# Altium PCB ControlBrick2_1.PcbDoc
Units mm, origin at the board's own origin, x right, y up, seen from the top; angles counter-clockwise.
Board outline 117 x 62.75 mm, 2 copper layers (Top Layer, Bottom Layer); 25 components, 129 nets, 106 pads, 0 vias.
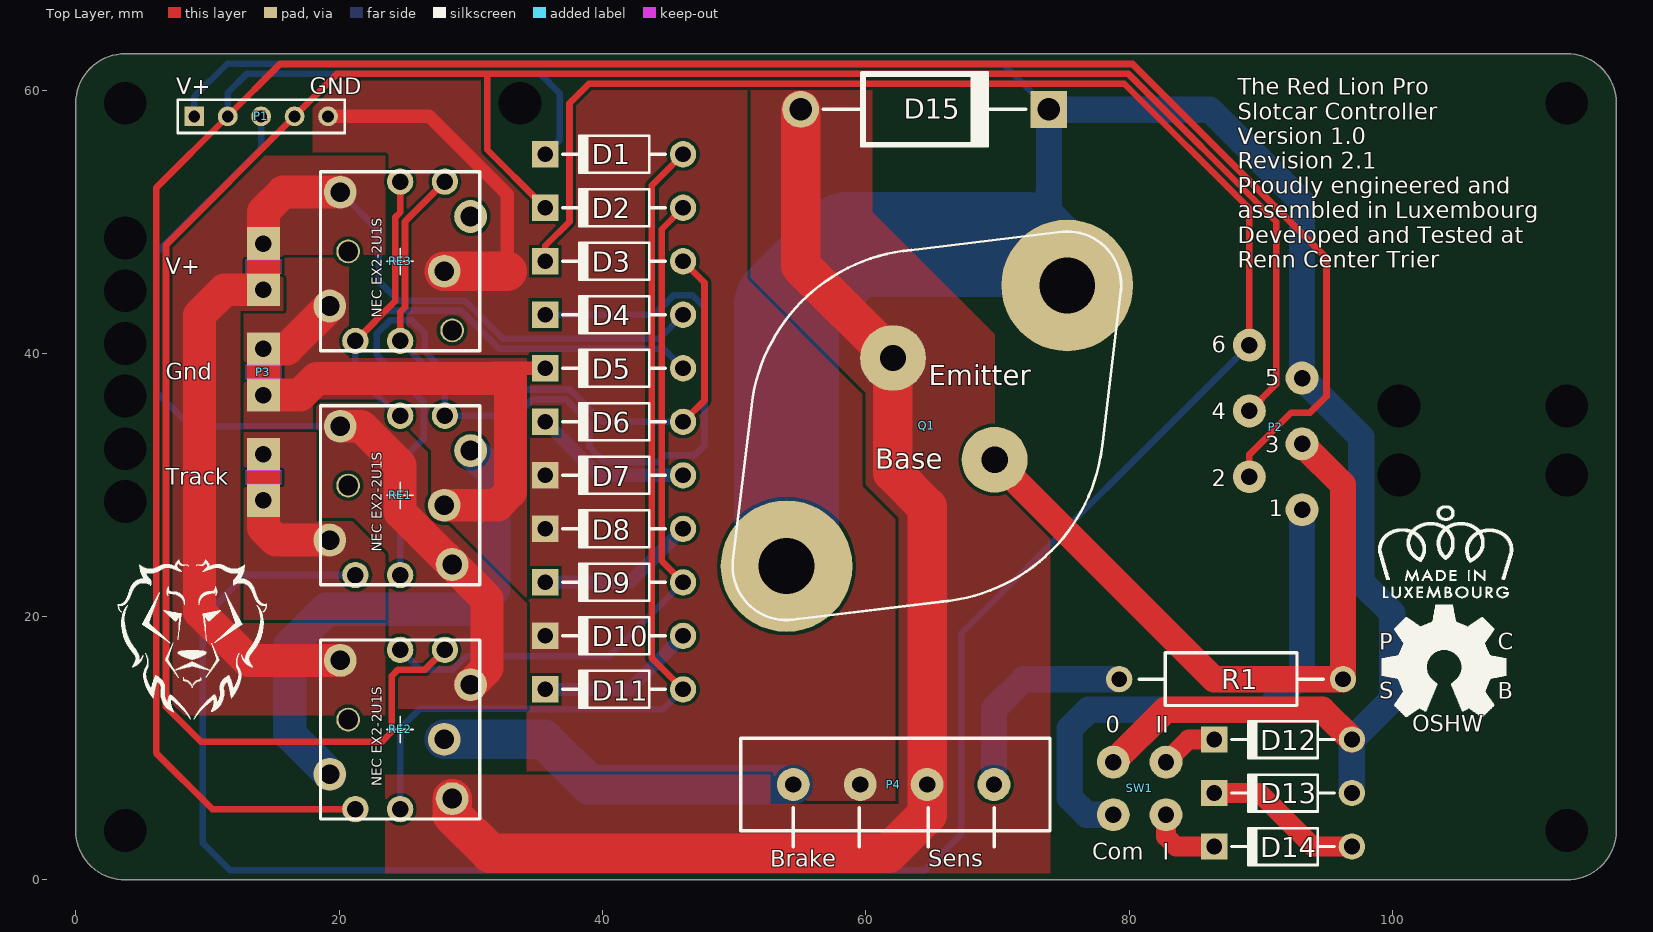
[diagram p0: Top Layer view]
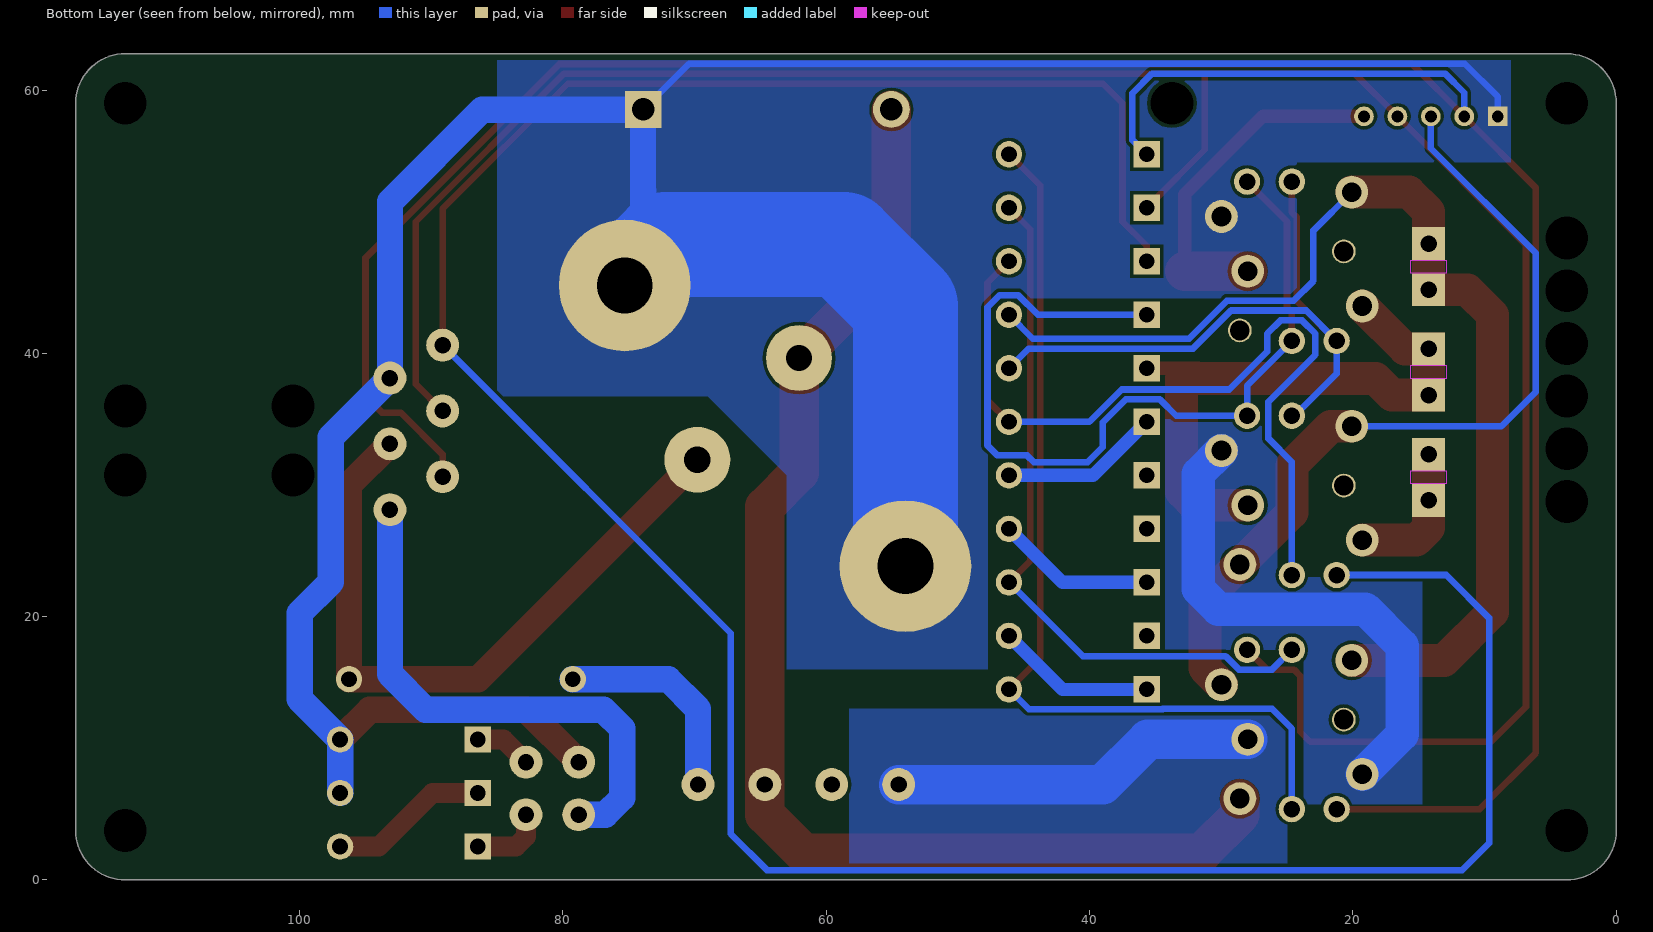
[diagram p1: Bottom Layer view, seen from below]

## Layer stack, top to bottom
Top Solder: solder mask 0.0102, Solder Resist, Dk 3.5
Top Layer: signal copper 0.0356
Dielectric 1: dielectric 0.32, FR-4, Dk 4.8
Bottom Layer: signal copper 0.0356
Bottom Solder: solder mask 0.0102, Solder Resist, Dk 3.5

## Board outline
0,3.75 ccw(c3.75,3.75) 3.75,0 113.25,0 ccw(c113.25,3.75) 117,3.75 117,59 ccw(c113.25,59) 113.25,62.75 3.75,62.75 ccw(c3.75,59) 0,59

## Design rules (kind name [scope] priority, off if disabled: settings)
Clearance [All] p1: gap=0.254 except(0.25: Track-Track Track-SMDPad Track-THPad Track-Via Track-Fill Track-Poly SMDPad-SMDPad SMDPad-THPad SMDPad-Via SMDPad-Fill SMDPad-Poly THPad-THPad THPad-Via THPad-Fill THPad-Poly Via-Via Via-Fill Via-Poly Fill-Fill Fill-Poly Poly-Poly)
ComponentClearance [All] p1 off: gap=0.254 collisioncheckmode=3 verticalgap=0.254 showdistances=FALSE
Height [All] p1 off: minheight=0 maxheight=25.4 prefheight=12.7
PlaneConnect [All] p1: planeconnectstyle=Direct reliefexpansion=0.508 reliefentries=4 reliefconductorwidth=0.254 reliefairgap=0.254
PolygonConnect [All] p1: connectstyle=Direct reliefconductorwidth=0.254 reliefentries=4 polygonreliefangle="90 Angle" airgapwidth=0.254
RoutingVias [All] p1: holewidth=0.711 width=1.27 viastyle="Through Hole" minholewidth=0.711 minwidth=1.27 maxholewidth=0.711 maxwidth=1.27
SolderMaskExpansion [All] p1: expansion=0.102
Width [All] p1: maxlimit=300 minlimit=0.01 preferedwidth=1
27 further rules are at their usual default settings.

## Components (designator, comment, footprint, x,y, rotation, side; value= is the part's Value field where it differs from the comment)
D1 "1N4002" StdDiode 40.894,55.118 r180 top
D2 "1N4002" StdDiode 40.894,51.054 r180 top
D3 "1N4002" StdDiode 40.894,46.99 r180 top
D4 "1N4002" StdDiode 40.894,42.926 r180 top
D5 "1N4002" StdDiode 40.894,38.862 r180 top
D6 "1N4002" StdDiode 40.894,34.798 r180 top
D7 "1N4002" StdDiode 40.894,30.734 r180 top
D8 "1N4002" StdDiode 40.894,26.67 r180 top
D9 "1N4002" StdDiode 40.894,22.606 r180 top
D10 "1N4002" StdDiode 40.894,18.542 r180 top
D11 "1N4002" StdDiode 40.894,14.478 r180 top
D12 "1N4002" StdDiode 91.694,10.668 r180 top
D13 "1N4002" StdDiode 91.694,6.604 r180 top
D14 "1N4002" StdDiode 91.694,2.54 r180 top
D15 "1N5402" BigDiode 64.475,58.525 r0 top
P1 "Logic" HDR1X5 9,58 r0 top
P2 "To Handle" Interconnect 93.14,28.122 r180 top
P3 "Inwards" Inwards 14.25,36.83 r90 top
P4 "Molex" Molex_4x50.8 54.5,7.25 r0 top
Q1 "BD317" TO-3 63.086,34.782 r180 top
R1 "10R2W" 2Wres 79.25,15.25 r0 top
RE1 "NEC-EX2" NEC-EX2#1 24.638,29.21 r90 top
RE2 "NEC-EX2" NEC-EX2#1 24.638,11.43 r90 top
RE3 "NEC-EX2" NEC-EX2#2 24.638,46.99 r90 top
SW1 "Reduction" "Switch SP3T" 82.804,4.953 r90 top

## Footprints (in the part's own frame and the unit in brackets; to place one, negate y for a bottom-side part, rotate by r counter-clockwise, add the part's x,y. Pads: shape width x height; smd on the part's side, far side on the other; paste and mask are expansions set on the pad)
2Wres [mm] "2 Watt Resistor"
  round 2 hole 1.2: 1(0,0) 2(17,0)
  silkscreen extent 1.5,-2 15.5,2
BigDiode [mm] "Diode, Axial; Body 9.5 x 5.6 mm (LxDia. max), Lead Dia. 1.32 mm (max)"
  round 2.8 hole 1.7: 1(-9.42,0)
  rect 2.8x2.8 hole 1.7: 2(9.42,0)
  silkscreen extent -7.7,-2.8 7.7,2.8
HDR1X5 [mm] "Connector; Header; 4 Position"
  rect 1.5x1.5 hole 0.9: 1(0,0)
  round 1.5 hole 0.9: 2(2.54,0) 3(5.08,0) 4(7.62,0) 5(10.16,0)
  silkscreen extent -1.27,-1.27 11.43,1.27
Interconnect [mm]
  round 2.5 / inner round 1.524 / far side round 2.5 hole 1.25: 1(0,0) 2(4,-2.5) 3(0,-5) 4(4,-7.5) 5(0,-10) 6(4,-12.5)
Inwards [mm] "3 Pin double connector"
  rect 2.5x2.5 / inner round 1.524 / far side rect 2.5x2.5 hole 1.25: 1(-8,0) 1(-4.5,0) 2(0,0) 2(3.5,0) 3(8,0) 3(11.5,0)
  Top Layer region: 6.75,-1.25 12.75,-1.25 12.75,1.25 6.75,1.25
  Top Layer region: -1.25,-1.25 4.75,-1.25 4.75,1.25 -1.25,1.25
  Top Layer region: -9.25,-1.25 -3.25,-1.25 -3.25,1.25 -9.25,1.25
  Multi-Layer keep-out region: 9.25,-1.35 10.25,-1.35 10.25,1.35 9.25,1.35
  Multi-Layer keep-out region: 1.25,-1.35 2.25,-1.35 2.25,1.35 1.25,1.35
  Multi-Layer keep-out region: -6.75,-1.35 -5.75,-1.35 -5.75,1.35 -6.75,1.35
Molex_4x50.8 [mm] "Molex connector 4 pin 5.08mm pitch"
  round 2.5 hole 1.25: 1(0,0) 2(5.08,0) 3(10.16,0) 4(15.24,0)
  silkscreen extent -4,-3.5 19.5,3.5
NEC-EX2#1 [mm] "NEC EX2-2U1S dual relay"
  round 2.5 hole 1.5: 1(-3.4,5.35) 4(-5.25,-3.95) 5(-0.75,-3.35) 6(3.4,-5.35) 9(5.25,4.55)
  round 2 hole 1.25: 2(-6.05,3.4) 3(-6.05,0) 7(6.05,-3.4) 8(6.05,0)
  round 1.8 hole 1.5: 10(0.75,3.95)
  silkscreen extent -6.8,-6.05 6.8,6.05
NEC-EX2#2 [mm] "NEC EX2-2U1S dual relay"
  round 2.5 hole 1.5: 1(-3.4,5.35) 5(-0.75,-3.35) 6(3.4,-5.35) 9(5.25,4.55)
  round 2 hole 1.25: 2(-6.05,3.4) 3(-6.05,0) 7(6.05,-3.4) 8(6.05,0)
  round 1.8 hole 1.5: 4(-5.25,-3.95) 10(0.75,3.95)
  silkscreen extent -6.8,-6.05 6.8,6.05
StdDiode [mm] "Diode, Axial; Body 5.2 x 2.7 mm (LxDia. max), Lead Dia. 0.86 mm (max)"
  round 2 hole 1.2: 1(-5.23,0)
  rect 2x2 hole 1.2: 2(5.23,0)
  silkscreen extent -3.9,-1.4 3.9,1.4
"Switch SP3T" [mm] "Suitable Switch"
  round 2.5 hole 1.25: 1(0,0) 2(4,4) 3(4,0) 4(0,4)
TO-3 [mm] "Oval Flange Mount with (2) Offset Leads; Pin Spacing 10.92 mm; Lead Dia. 1.15 mm (max)"
  round 5 hole 2: 1(-6.702,2.863) 2(1.019,-4.859)
  round 10 hole 4.25: 3(-12.218,-10.374) 3(9.102,10.945)
  silkscreen extent -16.32,-14.47 13.2,15.04

## Part data
D1 D2 D3 D4 D5 D6 D7 D8 D9 D10 D11 D12 D13 D14: library part "Diode 1N4002", "1 Amp General Purpose Rectifier"
D15: library part "Diode 1N5402", "3 Amp General Purpose Rectifier"
P1: library part "Header 5", "Header, 5-Pin"
P2: library part "Header 6", "Header, 6-Pin"
P3: library part "Header 3", "Header, 3-Pin"
P4: library part "Header 4", "Header, 4-Pin"
Q1: library part 2N3904, "NPN General Purpose Amplifier"
R1: library part Res2, "Resistor"
RE1 RE2: library part Component_2
RE3: library part NEC-EX2-2U1S
SW1: library part 3Way

## Free pads (board coordinates)
  round 2.5 hole 3.25: 2(3.75,3.75) 5(113.25,3.75) 6(113.25,59) 13(3.75,28.75) 14(3.75,32.75) 15(3.75,36.75) 16(3.75,40.75) 17(3.75,44.75) 18(3.75,48.75)
  round 0 hole 3.25: 3(3.75,59) 4(33.75,59) 19(100.5,36) 20(100.5,30.75) 21(113.25,36) 22(113.25,30.75)

## Nets (pads, with @x,y where several pads share a name; then routed paths per layer and width w, separated by ;. In a path a pad name is that pad's centre, name@x,y a point inside that pad or via, vN(x,y) a via of type N, cw(c..) or ccw(c..) an arc to the next point about the centre after c; other vN are vias at no path point)
+5V: 
GND: D7.2 D8.2 D10.2 P1.5 P4.2 RE3.5 | length 26.7
  Top Layer w1: P1.5 26.836,58 32.766,52.07 32.766,46.24
  Top Layer w3: RE3.5 32.766,46.24
NetD1_1: D1.1 D11.1 RE2.3 | length 71.5
  Top Layer w0.5: D11.1 43.75,16.852 43.75,52.744 D1.1
  Bottom Layer w0.5: RE2.3 24.638,11.5 26.138,13 34.435,13 34.457,12.978 44.624,12.978 D11.1
NetD1_2: D1.2 P1.2 P2.2 RE2.2 | length 211.9
  Top Layer w0.5: RE2.2 10.37,5.38 6.096,9.654 6.096,52.556 P1.2 15.516,61.976 80.264,61.976 94.996,47.244 94.996,36.746 93.75,35.5 92.317,35.5 89.14,32.324 P2.2
  Bottom Layer w0.5: P1.2 11.54,59.79 13,61.25 35.25,61.25 36.75,59.75 36.75,56.204 D1.2
NetD2_1: D2.1 D9.1 RE2.8 | length 54.6
  Top Layer w0.5: D9.1 44.5,24.23 44.5,49.43 D2.1
  Bottom Layer w0.5: RE2.8 26.138,15.98 28.659,15.98 29.679,17 40.518,17 D9.1
NetD2_2: D2.2 P1.4 P2.4 RE2.7 | length 183.7
  Top Layer w0.5: RE2.7 26.534,15.976 24.476,15.976 24,15.5 24,11.25 23.25,10.5 9.5,10.5 6.85,13.15 6.85,48.23 P1.4 19.842,61.222 31.25,61.222 ; D2.2@35.231,51.487 31.25,55.468 31.25,61.222 ; P2.4 91.186,37.668 91.186,49.988 79.952,61.222 31.25,61.222
NetD3_1: D3.1 D6.1 RE1.3 | length 61.8
  Top Layer w0.5: D6.1 47.75,36.424 47.75,45.364 D3.1
  Bottom Layer w0.5: RE1.3 24.638,31.75 26.416,33.528 26.416,36.322 22.86,39.878 22.86,41.501 23.859,42.5 25.5,42.5 26.5,41.5 26.5,40.139 29.389,37.25 37.561,37.25 40.013,34.798 D6.1
NetD3_2: D3.2 P2.6 RE1.2 | length 215.1
  Top Layer w0.5: D3.2 35.664,48.164 37.5,50 37.5,59 38.972,60.472 79.641,60.472 89.14,50.973 P2.6
  Bottom Layer w0.5: RE1.2 12.91,23.16 9.652,19.902 9.652,2.794 11.696,0.75 64.5,0.75 67.25,3.5 67.25,18.732 P2.6
NetD4_1: D4.1 P3.3 RE2.9 RE3.9 | length 82.9
  Top Layer w2.5: P3.3@14.25,44.83 11.302,44.83 9.398,42.926 9.398,20.352 13.07,16.68 RE2.9 ; P3.3@14.25,48.33 14.25,50.75 15.74,52.24 RE3.9
  Bottom Layer w0.5: RE3.9 23,49.328 23,45.5 24.5,44 29.561,44 32.449,41.112 44.31,41.112 D4.1
NetD4_2: D4.2 RE1.7 RE3.3 RE3.7 | length 68
  Top Layer w0.5: RE3.3 24.638,43.138 25.004,43.504 25.004,50.006 RE3.7
  Bottom Layer w0.5: RE3.3 28.038,37.54 RE1.7 33.419,35.26 34.659,36.5 37.25,36.5 39,34.75 39,32.876 40.142,31.734 44.234,31.734 44.75,32.25 47,32.25 47.75,33 47.75,43.5 46.824,44.426 45.426,44.426 43.926,42.926 D4.2
NetD5_1: D5.1 RE1.8 RE3.2 RE3.8 | length 48.4
  Top Layer w0.5: RE3.2 24.25,43.952 24.25,50.318 24.638,50.706 RE3.8
  Bottom Layer w0.5: RE1.8 24.43,35.26 21.238,38.452 RE3.2 23.548,43.25 29.25,43.25 32.138,40.362 44.624,40.362 D5.1
NetD5_2: D5.2 P3.2 RE1.5 RE3.1 | length 44.8
  Top Layer w1: 30.988,38.1 31.75,38.862 D5.2
  Top Layer w2.5: P3.2@14.25,36.83 17.018,36.83 18.288,38.1 30.988,38.1 33.02,38.1 33.02,29.464 32.016,28.46 RE1.5 ; P3.2@14.25,40.33 16.028,40.33 RE3.1
NetD6_2: D6.2 D7.1 | length 12.1
  Bottom Layer w1: D6.2 39.728,30.734 D7.1
NetD8_1: D8.1 D9.2 | length 12.1
  Bottom Layer w1: D9.2 42.06,22.606 D8.1
NetD10_1: D10.1 D11.2 | length 12.1
  Bottom Layer w1: D11.2 42.06,14.478 D10.1
NetD12_2: D12.2 SW1.3 | length 4.4
  Top Layer w1.5: SW1.3 84.519,10.668 D12.2
NetD13_2: D13.2 D14.1 | length 12.1
  Top Layer w1.5: D13.2 89.916,6.604 93.98,2.54 D14.1
NetD14_2: D14.2 SW1.1 | length 5.6
  Top Layer w1.5: SW1.1 82.804,3.302 83.566,2.54 D14.2
NetD15_1: D15.1 P4.3 Q1.2 RE2.4 | length 97.2
  Top Layer w3: RE2.4 28.588,4.94 31.496,2.032 61.722,2.032 64.66,4.97 64.66,28.34 62.066,30.934 Q1.2 55.055,46.652 D15.1@55.055,58.459
NetD16_2: 
NetD17_1: 
NetD18_1: 
NetD19_1: 
NetD20_1: 
NetD21_1: 
NetD22_1: 
NetDP1_1: 
NetDP1_2: 
NetDP1_3: 
NetDP1_4: 
NetDP1_5: 
NetDP1_7: 
NetDP1_8: 
NetDP1_9: 
NetDP1_10: 
NetDP1_11: 
NetDP1_12: 
NetP1_3: P1.3 RE1.4 RE1.9 RE2.6 | length 65
  Top Layer w2.5: RE1.9 21.674,34.46 24.638,31.496 24.638,27.91 31.242,21.306 31.242,16.084 RE2.6
  Bottom Layer w0.5: P1.3 14.08,55.58 6.096,47.596 6.096,37.084 8.72,34.46 RE1.9
NetP2_1: P2.1 SW1.4 | length 40.9
  Bottom Layer w2: SW1.4 76.797,4.953 75.5,6.25 75.5,11.5 76.918,12.918 90.418,12.918 93.14,15.64 P2.1 P2.1@93.136,28.118
NetP2_3: P2.3 Q1.1 R1.2 | length 52.5
  Top Layer w2: Q1.1 86.457,15.25 R1.2 96.25,30.012 P2.3
NetP3_1: P3.1 RE1.1 | length 7.2
  Top Layer w2.5: P3.1@14.25,28.5 14.25,26.75 15.19,25.81 RE1.1
NetP4_1: P4.1 RE2.5 | length 27.9
  Bottom Layer w3: RE2.5 35.57,10.68 39,7.25 P4.1
NetP4_4: P4.4 R1.1 | length 16.2
  Bottom Layer w2: P4.4 69.74,12.99 72,15.25 R1.1
NetP5_1: 
NetP5_2: 
NetP5_3: 
NetP5_4: 
NetP6_2: 
NetP8_2: 
NetP8_3: 
NetP8_4: 
NetP9_2: 
NetP10_1: 
NetP10_3: 
NetP10_4: 
NetP10_5: 
NetP12_1: 
NetP12_2: 
NetP12_3: 
NetP12_4: 
NetP12_5: 
NetP12_6: 
NetP12_7: 
NetP12_8: 
NetP12_9: 
NetP12_10: 
NetP12_11: 
NetP12_12: 
NetP12_13: 
NetP12_14: 
NetP12_15: 
NetP12_16: 
NetP12_17: 
NetP12_18: 
NetP12_19: 
NetP12_20: 
NetP12_21: 
NetP12_22: 
NetP12_23: 
NetP12_24: 
NetP12_25: 
NetP12_26: 
NetP13_1: 
NetP13_2: 
NetP13_3: 
NetP13_4: 
NetP13_5: 
NetP13_6: 
NetP13_7: 
NetP13_8: 
NetP13_9: 
NetP13_10: 
NetP13_11: 
NetP13_12: 
NetP13_13: 
NetP13_14: 
NetP13_15: 
NetP13_16: 
NetP13_17: 
NetP13_18: 
NetP13_19: 
NetP13_20: 
NetP13_21: 
NetP13_22: 
NetP13_23: 
NetP13_24: 
NetP13_25: 
NetP13_26: 
NetP14_1: 
NetP16_1: 
NetP17_1: 
NetP18_5: 
NetP18_6: 
NetQ2_1: 
NetQ3_1: 
NetQ4_1: 
NetQ5_1: 
NetR5_1: 
NetR8_1: 
NetR9_1: 
NetR11_1: 
NetR11_2: 
NetR11_3: 
NetR11_4: 
NetR17_1: 
NetR17_2: 
NetR17_3: 
NetRE1_6: RE1.6 RE2.1 | length 39.5
  Bottom Layer w2.54: RE2.1 16.256,11.062 16.256,17.78 19.05,20.574 30.226,20.574 31.75,22.098 31.75,30.848 RE1.6
V+: D12.1 D13.1 D15.2 P1.1 P2.5 Q1.3 RE3.6 SW1.2 | length 214.9
  Top Layer w2: SW1.2 82.769,12.918 94.674,12.918 D12.1
  Bottom Layer w0.5: P1.1 9,59.5 11.5,62 70.42,62 D15.2
  Bottom Layer w2: Q1.3@73.895,46.565 73.92,58.5 86.14,58.5 93.14,51.5 P2.5 97.625,33.637 97.625,22.625 100,20.25 100,13.744 D12.1 D13.1
  Bottom Layer w8: Q1.3@53.984,23.837 53.984,43.57 58.674,48.26 72.2,48.26 Q1.3@73.895,46.565
pads on no net: RE1.10 RE2.10 RE3.4 RE3.10

## Polygon pours and split planes (outlines as drawn)
NetD4_1 on Top Layer "NETD4_1_L01_P076" (solid, remove dead copper, pour order 76): 6.25,12.5 23.5,12.5 23.5,14.25 23.5,16 23.5,19.5 12.5,19.5 12.5,43.25 15.75,43.25 15.75,47.5 23.5,47.5 23.5,55 6.25,55
NetP3_1 on Top Layer "NETP3_1_L01_P078" (solid, remove dead copper, pour order 78): 12.5,34 18.25,34 18.25,27.25 21,27.25 23.5,24.75 23.5,19.5 12.5,19.5
NetP1_3 on Top Layer "NETP1_3_L01_P080" (solid, remove dead copper, pour order 80): 23.49,13 34.25,13 34.25,21 28.5,26.75 26.75,28.5 26.75,32.5 23,36.25 18.25,36.25 18.25,27.25 23.49,22.01
NetD5_2 on Top Layer "NETD5_2_L01_P082" (solid, remove dead copper, pour order 82): 12.5,43.25 12.5,34 18.25,34 18.25,35.93 23.32,35.93 26.75,32.5 26.75,21 34.25,21 34.25,35 34.25,37.5 34.25,39.624 20.75,39.624 20.75,47.5 12.5,47.5
NetD15_1 on Top Layer "NETD15_1_L01_P086" (solid, remove dead copper, pour order 86): 23.5,8 42.25,8 52.75,8 52.75,5.75 57.75,5.75 62.5,5.75 62.5,7.25 66.25,7.25 66.25,0.5 23.5,0.5
NetD15_1 on Top Layer "NETD15_1_L01_P088" (solid, remove dead copper, pour order 88): 62.5,7.25 62.5,27.5 60,30 60,37 58.75,38.25 51.25,45.75 51.25,53.25 51.25,60.75 60.5,60.75 60.5,50.75 69.788,41.462 69.788,31.962 74,27.75 74,0.5 62.5,0.5
GND on Top Layer "GND_L01_P090" (solid, remove dead copper, pour order 90): 18,55 18,61 51.25,61 51.25,45.75 60,37 62.5,34.5 62.5,5.5 62.5,4.75 34.25,4.75 34.25,11.25 34.25,39.878 20.75,39.878 20.75,55 19.25,55
NetRE1_6 on Bottom Layer "NETRE1_6_L02_P094" (solid, remove dead copper, pour order 94): 34.25,35 25.75,35 25.75,23 14.75,23 14.75,5.75 23.75,5.75 23.75,17.5 34.25,17.5
V+ on Bottom Layer "V+_L02_P096" (solid, remove dead copper, pour order 96): 24.25,44.196 24.25,54.5 8,54.5 8,62.25 85,62.25 85,36.75 69,36.75 63,30.75 63,16 47.75,16 47.75,44.196
NetP4_1 on Bottom Layer "NETP4_1_L02_P100" (solid, pour order 100): 25,13 25,0.5 58.25,0.5 58.25,13

## Silkscreen, mask and mechanical layers (free items; w line width, h text height)
Top Overlay:
  drawing of 4986 lines, arcs and shapes, not listed
  text "V+" at 7.62,59.69 h1.25
  text "GND" at 17.78,59.69 h1.25
  text "The Red Lion Pro / Slotcar Controller / Version 1.0 / Revision 2.1 / Proudly engineered and  / assembled in Luxembourg / Developed and Tested at  / Renn Center Trier" at 88.25,46.5 h1.25
  text "V+" at 6.85,46 h1.25
  text "6" at 86.282,40.06 h1.25
  text "Gnd" at 6.85,38 h1.25
  text "Emitter" at 64.77,37.576 h1.52
  text "5" at 90.346,37.52 h1.25
  text "4" at 86.282,34.98 h1.25
  text "3" at 90.346,32.44 h1.25
  text "Base" at 60.706,31.226 h1.52
  text "Track" at 6.85,30 h1.25
  text "2" at 86.282,29.9 h1.25
  text "1" at 90.6,27.614 h1.25
  text "P" at 99,17.5 h1.25
  text "C" at 108,17.5 h1.25
  text "S" at 99,13.75 h1.25
  text "B" at 108,13.75 h1.25
  text "OSHW" at 101.5,11.25 h1.25
  text "0" at 78.232,11.176 h1.25
  text "II" at 82.042,11.176 h1.25
  text "Com" at 77.216,1.524 h1.25
  text "I" at 82.55,1.524 h1.25
  text "Brake" at 52.75,1 h1.25
  text "Sens" at 64.75,1 h1.25
Mechanical 1:
  the board outline again, w0.2

## Text inside footprints (layer, text, board x,y; h text height)
RE1: Top Overlay "NEC EX2-2U1S" at 23.238,24.91 h0.75 r90
RE2: Top Overlay "NEC EX2-2U1S" at 23.238,7.13 h0.75 r90
RE3: Top Overlay "NEC EX2-2U1S" at 23.238,42.69 h0.75 r90